# EAGLE board schem-v1 (EAGLE 9.6.2)
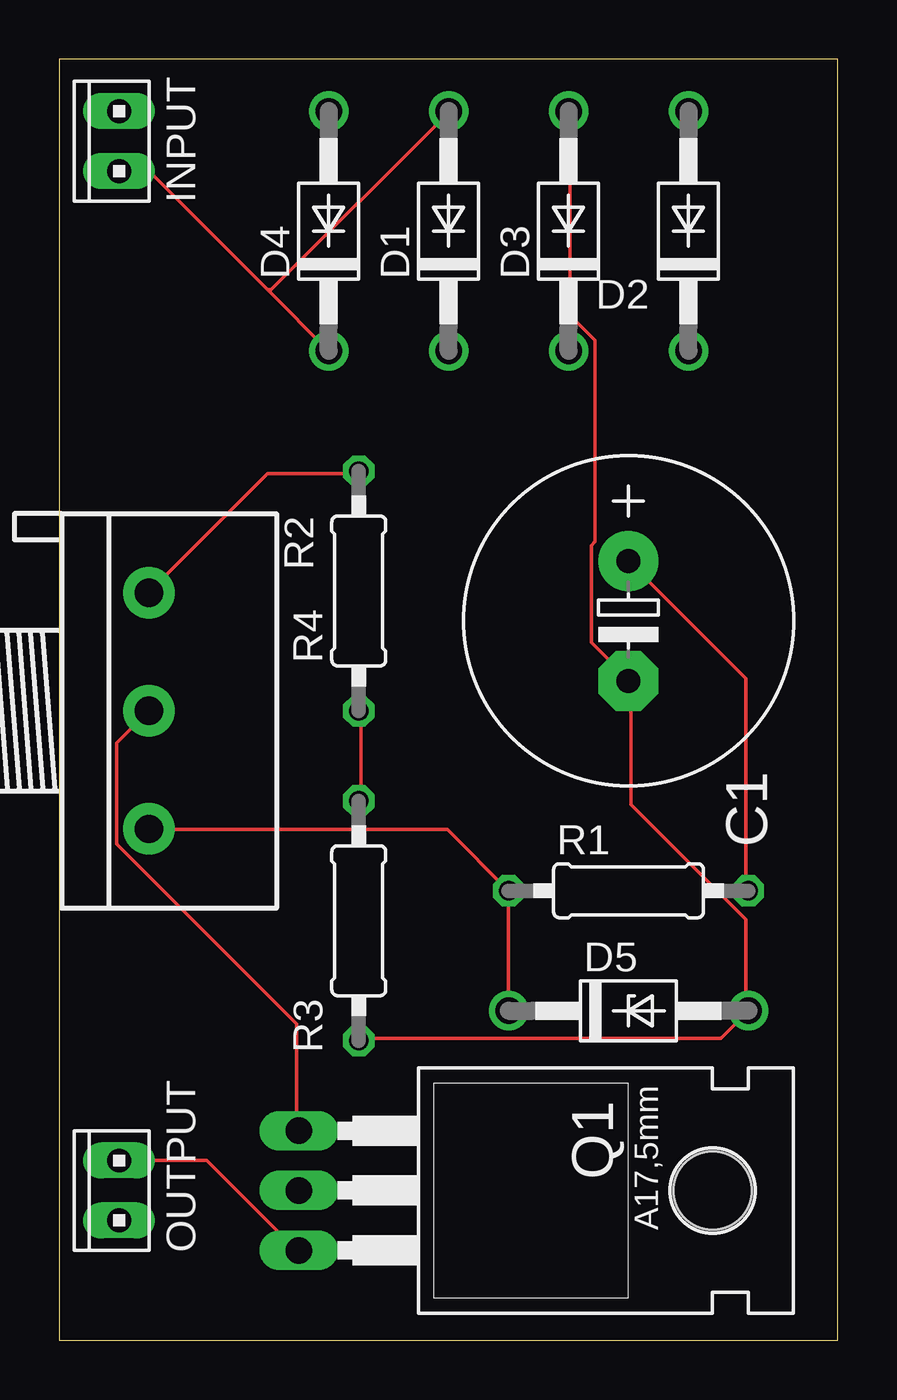
[diagram p0: board, top side]
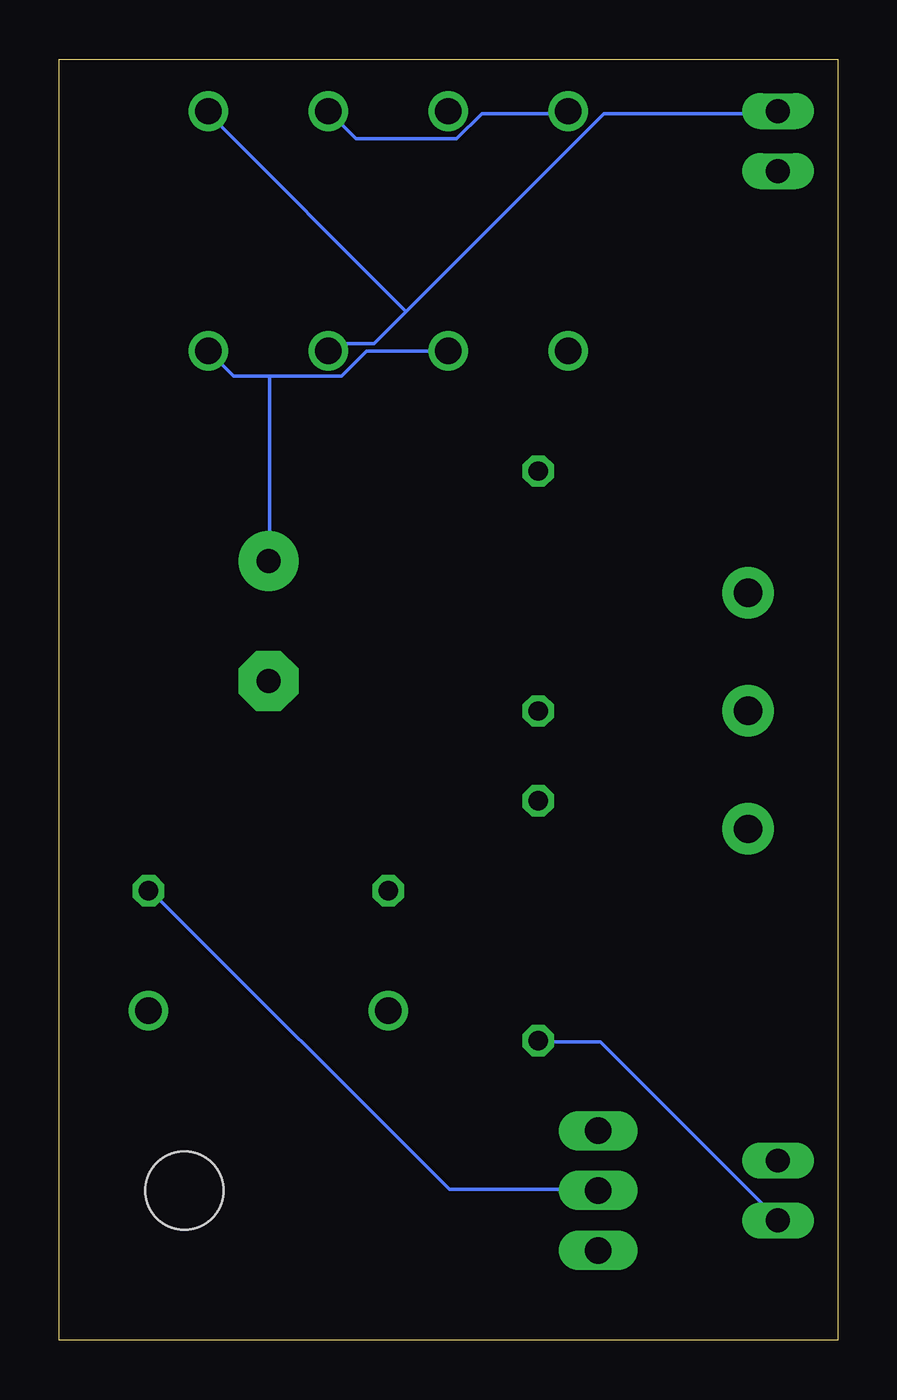
[diagram p1: board, bottom side, seen from below]

Size 33 x 54.28 mm. Coordinates in mm from the lower left corner, seen from the top.
Outline: 0,0 33,0 33,54.28 0,54.28 0,0
Copper layers (1*16): Top 0.035mm / dielectric 1.5mm / Bottom 0.035mm
Design rules "default": minimum track width 6mil, minimum drill 0.35mm, track to track 6mil, track to pad 6mil, pad to pad 6mil, via to via 6mil, smd to smd 6mil, copper to edge 40mil, drill to drill 6mil, minimum pad ring 10mil, minimum via ring 8mil, stop-mask expansion 4mil, vias tented up to drill 0mil, thermal gap 10mil

## Footprints (pad centres in the part's own frame; a part is rotated, then mirrored left to right if it is on the bottom)
E5-13 = drill 1.016 pad 2.54: + -2.54,0 | drill 1.016 pad 2.54 octagon: - 2.54,0
DO41-10 = drill 1.118: A 5.08,0; C -5.08,0
DO41Z10 = drill 1.118: A 5.08,0; C -5.08,0
10X02MTA = drill 1.016 long: 1 1.27,0; 2 -1.27,0
TO220AH = drill 1.118 long: B -2.54,-6.35; C 0,-6.35; E 2.54,-6.35 | hole 3.302: 0,11.176
0207/10 = drill 0.813 octagon: 1 -5.08,0; 2 5.08,0
3RP/1610N = drill 1.2 pad 2.184: 1 -5,0; 2 0,0; 3 5,0

## Placement (x,y rotation side)
C1  1000uF  [E5-13]  24.13,30.48 270 top
D1  1N4007  [DO41-10]  16.51,46.99 90 top
D2  1N4007  [DO41-10]  26.67,46.99 90 top
D3  1N4007  [DO41-10]  21.59,46.99 90 top
D4  1N4007  [DO41-10]  11.43,46.99 90 top
D5  [DO41Z10]  24.13,13.97 0 top
INPUT  12VRMS  [10X02MTA]  2.54,50.8 90 top
OUTPUT  [10X02MTA]  2.54,6.35 90 top
Q1  TIP120  [TO220AH]  16.51,6.35 270 top
R1  1k  [0207/10]  24.13,19.05 0 top
R2  10k  [3RP/1610N]  3.81,26.67 270 top
R3  2.2k  [0207/10]  12.7,17.78 90 top
R4  2.2k  [0207/10]  12.7,31.75 90 top

## Library data of the parts
C1 = rcl; SPICEPREFIX: C
D1-D5 = diode
INPUT = con-amp; SPICEPREFIX: I
OUTPUT = con-amp
Q1 = transistor-power
R1 R3 R4 = rcl; SPICEPREFIX: R
R2 = pot

## Nets
GND: C1.- D3.A D4.A D5.A OUTPUT.2 R3.1
N$1: D1.A D4.C INPUT.2
N$2: D2.A D3.C INPUT.1
N$3: D5.C R1.1 R2.3
N$4: R2.1 R4.2
N$5: R3.2 R4.1
N$6: Q1.B R2.2
N$7: OUTPUT.1 Q1.E
VCC: C1.+ D1.C D2.C Q1.C R1.2

## Tracks (layer width: path | path; a pad name or v marks a point on that pad's centre or on a via)
GND
  Top 0.152: D3.A 21.64,51.97 21.64,43.43 22.71,42.37 22.71,33.83 22.55,33.68 22.55,29.57 24.08,28.04 C1.- 24.23,27.89 24.23,22.71 29.11,17.83 29.11,14.02 D5.A 28.04,12.8 12.8,12.8 R3.1
  Bottom 0.152: R3.1 12.65,12.65 10.06,12.65 2.59,5.18 OUTPUT.2 | D3.A 20.42,50.9 16.15,50.9 15.09,51.97 11.43,51.97 D4.A
N$1
  Top 0.152: INPUT.2 3.81,49.53 8.84,44.5 | D4.C 8.84,44.5 | 8.84,44.5 8.99,44.5 16.46,51.97 D1.A
N$2
  Bottom 0.152: 18.29,43.59 19.66,42.22 21.18,42.22 21.49,41.91 D3.C | 18.29,43.59 9.91,51.97 2.59,51.97 INPUT.1 | 18.29,43.59 26.67,51.97 D2.A
N$3
  Top 0.152: D5.C R1.1 16.46,21.64 3.81,21.64 R2.3
N$4
  Top 0.152: R4.2 12.65,36.73 8.84,36.73 3.81,31.7 R2.1
N$5
  Top 0.152: R3.2 12.8,22.86 12.8,26.67 R4.1
N$6
  Top 0.152: R2.2 2.44,25.3 2.44,21.03 10.06,13.41 10.06,8.99 Q1.B
N$7
  Top 0.152: OUTPUT.1 6.25,7.62 10.06,3.81 Q1.E
VCC
  Top 0.152: C1.+ 29.11,28.04 29.11,19.05 R1.2
  Bottom 0.152: D1.C 19.96,41.91 21.03,40.84 24.08,40.84 | 24.08,40.84 25.6,40.84 D2.C | Q1.C 10.21,6.4 16.46,6.4 29.11,19.05 R1.2 | 24.08,40.84 24.08,33.07 C1.+